# Altium PCB PCB2.PcbDoc
Units mm, origin at the board's own origin, x right, y up, seen from the top; angles counter-clockwise.
Board outline 80.26 x 48.27 mm, 2 copper layers (Top Layer, Bottom Layer); 29 components, 26 nets, 146 pads, 15 vias.
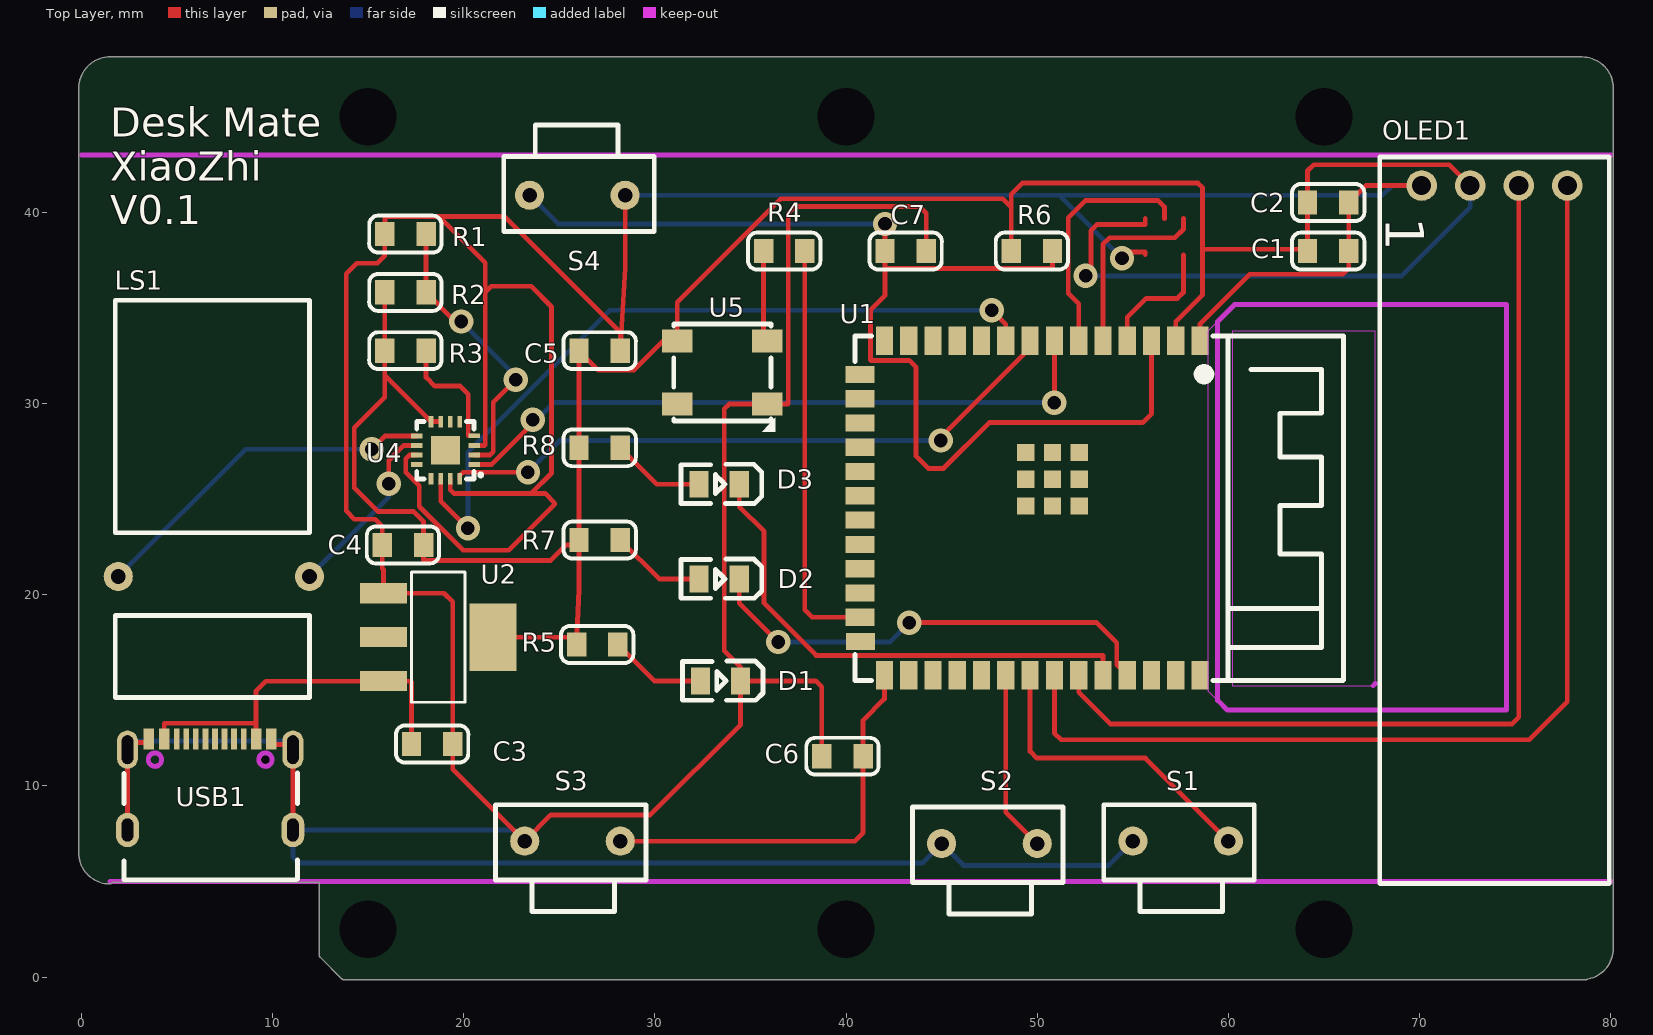
[diagram p0: Top Layer view]
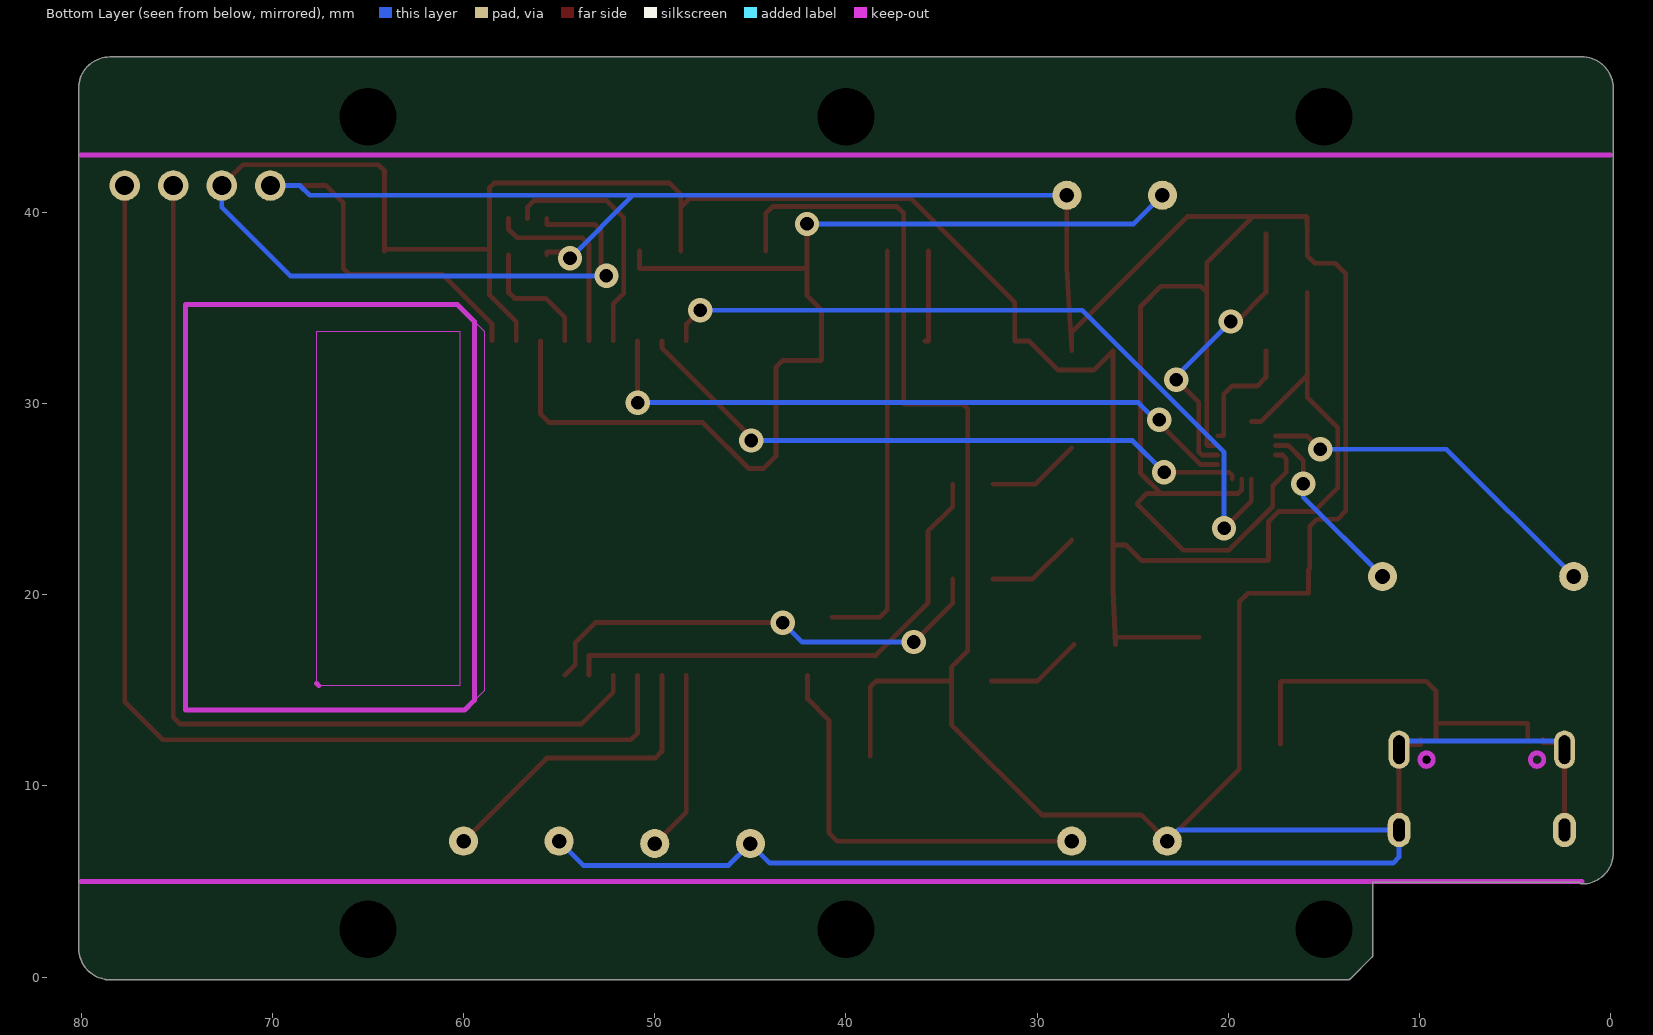
[diagram p1: Bottom Layer view, seen from below]
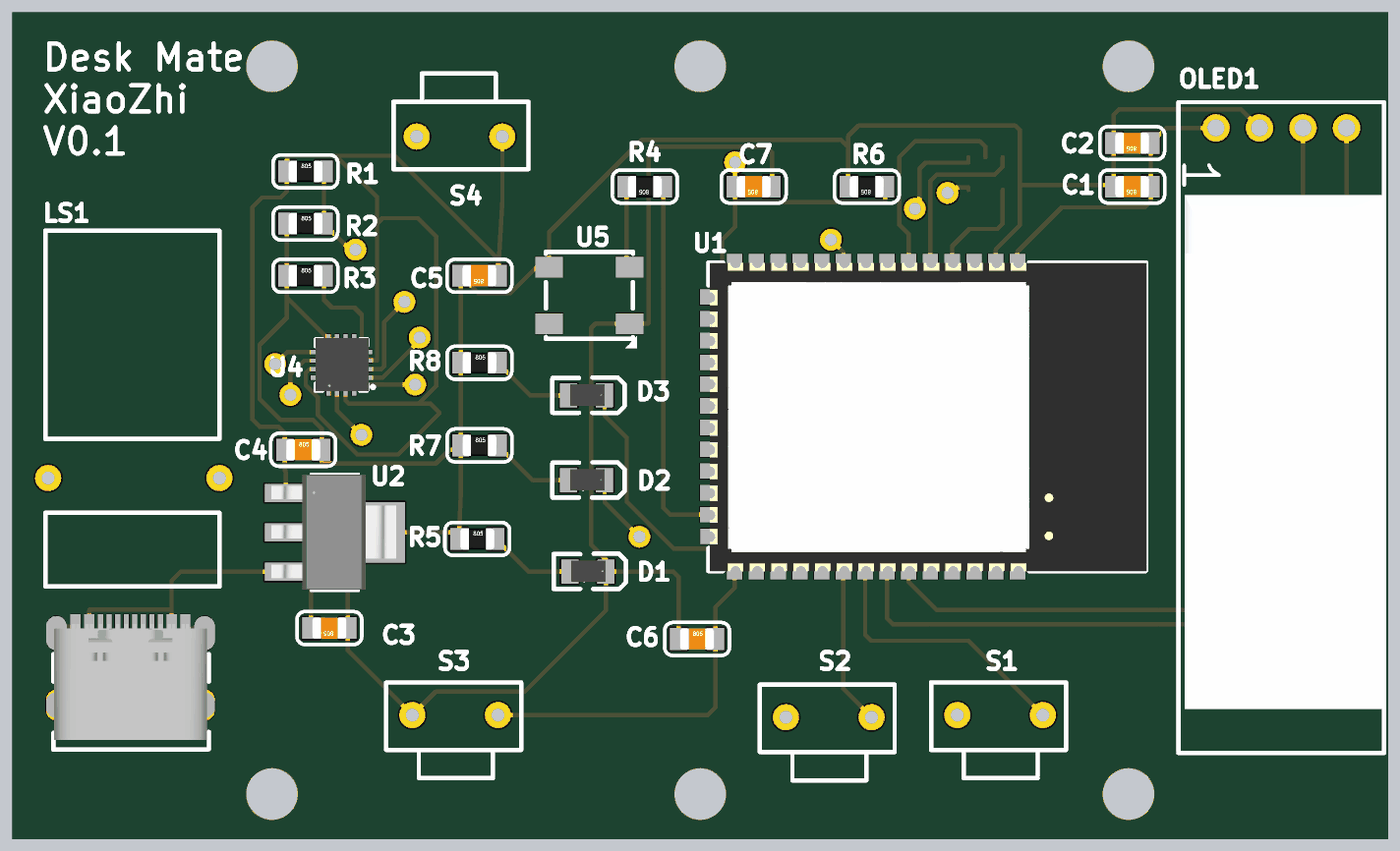
[diagram p2: 3D render of the assembled board from above, using the file's embedded part models]

## Layer stack, top to bottom
Top Solder: solder mask 0.0102, Solder Resist, Dk 3.5
Top Layer: signal copper 0.0356
Dielectric 1: dielectric 0.32, FR-4, Dk 4.8
Bottom Layer: signal copper 0.0356
Bottom Solder: solder mask 0.0102, Solder Resist, Dk 3.5

## Board outline
1.5,4.873 ccw(c1.5,5) 1.618,4.953 12.446,4.953 12.446,1.143 ccw(c12.573,1.143) 12.483,1.052 12.483,1.053 13.626,-0.09 13.625,-0.09 ccw(c13.716,0) 13.716,-0.127 78.716,-0.127 ccw(c78.716,0) 78.794,-0.101 ccw(c78.5,1.5) 80.127,1.5 80.127,46.5 ccw(c78.5,46.5) 78.5,48.127 1.576,48.127 ccw(c1.524,48.011) 1.524,48.139 ccw(c1.524,46.482) -0.127,46.35 -0.127,6.5 ccw(c1.5,6.5)

## Design rules (kind name [scope] priority, off if disabled: settings)
Clearance [All] p1: gap=0.15 ignorepadtopadclearanceinfootprint=TRUE
MinimumSolderMaskSliver [All] p1: minsoldermaskwidth=0.051
PolygonConnect [All] p1: connectstyle=Relief reliefconductorwidth=0.254 reliefentries=4 polygonreliefangle="90 Angle" airgapwidth=0.254
RoutingVias [All] p1: holewidth=0.711 width=1.27 viastyle="Through Hole" minholewidth=0.305 minwidth=0.61 maxholewidth=0.711 maxwidth=1.27
SilkToSilkClearance [All] p1: silktosilkclearance=0.051
SilkToSolderMaskClearance [IsPad] p1: minsilkscreentomaskgap=0.051 clearancetoexposedcopper=TRUE
SolderMaskExpansion [All] p1: expansion=0.102 istentingtop=FALSE
Width [All] p1: maxlimit=2 minlimit=0.14 preferedwidth=0.25
27 further rules are at their usual default settings.

## Components (designator, comment, footprint, x,y, rotation, side; value= is the part's Value field where it differs from the comment)
C1 "Cap" 0805C 66.294,37.973 r180 top value=0.1u
C2 "Cap" 0805C 66.294,40.513 r180 top value=10u
C3 "Cap" 0805C 19.431,12.192 r180 top value=10u
C4 "Cap" 0805C 15.748,22.606 r0 top value=10u
C5 "Cap" 0805C 28.191,32.766 r180 top value=10u
C6 "Cap Semi" 0805C 38.735,11.557 r0 top value=0.1u
C7 "Cap Semi" 0805C 44.196,37.973 r180 top value=0.1u
D1 "LED_R" LED0805-R-RD 33.435,15.494 r180 top locked
D2 "LED_G" LED0805-R-RD 33.367,20.828 r180 top locked
D3 "LED_Y" LED0805-R-RD 33.367,25.781 r180 top locked
LS1 "Speaker" SPK_11X15 11.938,20.955 r90 top locked
OLED1 "HS91L02W2C01" OLED-TH_L38.0-W12.0_HS91L02W2C01 73.914,41.402 r270 top
R1 "Res1" 0805R 15.875,38.862 r0 top value=0
R2 "Res1" 0805R 15.875,35.814 r0 top value=0
R3 "Res1" 0805R 15.875,32.766 r0 top value=300K
R4 "Res1" 0805R 37.846,37.973 r180 top value=0
R5 "Res1" 0805R 25.908,17.399 r0 top value=5k
R6 "Res1" 0805R 50.8,37.973 r180 top value=10k
R7 "Res1" 0805R 26.035,22.86 r0 top value=5k
R8 "Res1" 0805R 26.035,27.686 r0 top value=5k
S1 "SW-PB V+" SW_SIDE_CLICK_6X3X3 55,7.112 r270 top
S2 "SW-PB V-" SW_SIDE_CLICK_6X3X3 45,6.985 r270 top
S3 "SW-PB BOOT" SW_SIDE_CLICK_6X3X3 23.194,7.112 r270 top
S4 "SW-PB" SW_SIDE_CLICK_6X3X3 28.448,40.894 r90 top
U1 "ESP32-S3-WROOM-1-N16R2" WIRELM-SMD_ESP32-S3-WROOM-1 49.622,24.538 r270 top locked
U2 "LM1117IMPX-3.3/NOPB" SOT-223_L6.5-W3.5-P2.30-LS7.0-BR 18.669,17.78 r180 top
U4 "MAX98357AETE+T" TQFN-16_L3.0-W3.0-P0.50-BL-EP1.5 19.05,27.559 r90 top
U5 "SK6812" LED-SMD_4P-L5.0-W5.0-LS5.4-TL-1 33.528,31.623 r0 top locked
USB1 "TYPE-C 16PIN 2MD(073)" USB-C-SMD_TYPE-C-6PIN-2MD-073 6.744,10.071 r0 top locked

## Footprints (in the part's own frame and the unit in brackets; to place one, negate y for a bottom-side part, rotate by r counter-clockwise, add the part's x,y. Pads: shape width x height; smd on the part's side, far side on the other; paste and mask are expansions set on the pad)
0805C [mil]
  rect 40x50 smd: 1(0,0) 2(85,0)
  silkscreen extent -32,-38 117,38, body extent 3,-25 82,25, height 30
0805R [mil]
  rect 40x50 smd: 1(0,0) 2(85,0)
  silkscreen extent -32,-38 117,38, body extent 3,-25 82,25, height 30
LED0805-R-RD [mm]
  rect 1x1.4 smd: 1(1.05,0) 2(-1.05,0)
  silkscreen extent -2.22,-1.04 1.99,1.01, body extent -1.05,-0.65 0.95,0.6, height 0.71
LED-SMD_4P-L5.0-W5.0-LS5.4-TL-1 [mm]
  rect 1.6x1.2 smd paste+0 mask+0.05: 1(-2.35,1.65) 2(-2.35,-1.65) 3(2.35,-1.65) 4(2.35,1.65)
  silkscreen extent -2.54,-3.09 2.77,2.54
OLED-TH_L38.0-W12.0_HS91L02W2C01 [mm]
  round 1.6 hole 1: 1(0,-3.81) 2(0,-1.27) 3(0,1.27) 4(0,3.81)
  silkscreen extent -1.5,-6 36.5,6, body extent 3.93,-5.62 33.93,5.87, height 1.93
SOT-223_L6.5-W3.5-P2.30-LS7.0-BR [mm]
  rect 2.465x1.05 smd: 1(2.858,-2.3) 2(2.857,0) 3(2.857,2.3)
  rect 2.465x3.54 smd: 4(-2.857,0)
  silkscreen extent -1.4,-3.4 1.4,3.4, body extent -3.6,-3.38 3.69,3.33, height 1.81
SPK_11X15 [mil]
  round 60 hole 30: 1(0,0) 2(0,393.7)
  silkscreen extent -249,0 569,400
SW_SIDE_CLICK_6X3X3 [mil]
  round 60 hole 30: 1(0,0) 2(0,196.85)
  silkscreen extent -75,-60 145,250
TQFN-16_L3.0-W3.0-P0.50-BL-EP1.5 [mm]
  rect 0.25x0.6 smd paste-100 mask+0.051: 1(-0.748,-1.5) 2(-0.249,-1.5) 3(0.252,-1.5) 4(0.751,-1.5) 9(0.75,1.5) 10(0.25,1.5) 11(-0.25,1.5) 12(-0.748,1.5)
  rect 0.6x0.25 smd paste-100 mask+0.051: 5(1.5,-0.748) 6(1.5,-0.248) 7(1.5,0.252) 8(1.5,0.752) 13(-1.5,0.752) 14(-1.5,0.252) 15(-1.5,-0.248) 16(-1.5,-0.748)
  rect 1.5x1.5 smd paste-100 mask+0.051: 17(0,0)
  silkscreen extent -1.5,-1.9 1.5,1.5, body extent -1.52,-1.6 1.58,1.5, height 0.81
USB-C-SMD_TYPE-C-6PIN-2MD-073 [mm]
  rect 0.55x1.1 smd paste-100 mask+0.05: 1(-3.2,2.375) 2(-2.4,2.375) 11(2.4,2.375) 12(3.2,2.375)
  rect 0.3x1.1 smd paste-100 mask+0.05: 3(-1.75,2.375) 4(-1.25,2.375) 5(-0.75,2.375) 6(-0.25,2.375) 7(0.25,2.375) 8(0.75,2.375) 9(1.25,2.375) 10(1.75,2.375)
  oval 1.2x1.8 hole 0.6 slot 1.2 at 90 deg paste+0 mask+0.05: 13(-4.325,-2.375) 14(4.325,-2.375)
  oval 1.1x2 hole 0.6 slot 1.5 at 90 deg paste+0 mask+0.05: 13(-4.325,1.825) 14(4.325,1.825)
  Keep-Out Layer board cut-out: 3.24,1.305 3.191,1.477 3.063,1.603 2.89,1.649 2.717,1.603 2.589,1.477 2.54,1.305 2.54,1.305 2.589,1.133 2.717,1.007 2.89,0.961 3.063,1.007 3.191,1.133 3.24,1.305
  Keep-Out Layer circle w0.254: c2.89,1.305 r0.35
  Keep-Out Layer circle w0.025: c2.89,1.305 r0.35
  Keep-Out Layer circle w0.254: c-2.89,1.305 r0.35
  Keep-Out Layer circle w0.025: c-2.89,1.305 r0.35
  silkscreen extent -4.5,-4.97 4.57,0.6, body extent -4.47,-4.4 4.47,2.35, height 3.17
WIRELM-SMD_ESP32-S3-WROOM-1 [mm]
  rect 1.5x0.9 smd paste+0 mask+0.05: 1(-8.75,8.895) 2(-8.75,7.625) 3(-8.75,6.355) 4(-8.75,5.085) 5(-8.75,3.815) 6(-8.75,2.545) 7(-8.75,1.275) 8(-8.75,0.005) 9(-8.75,-1.265) 10(-8.75,-2.535) 11(-8.75,-3.805) 12(-8.75,-5.075) 13(-8.75,-6.345) 14(-8.75,-7.615) 27(8.75,-7.615) 28(8.75,-6.345) 29(8.75,-5.075) 30(8.75,-3.805) 31(8.75,-2.535) 32(8.75,-1.265) 33(8.75,0.005) 34(8.75,1.275) 35(8.75,2.545) 36(8.75,3.815) 37(8.75,5.085) 38(8.75,6.355) 39(8.75,7.625) 40(8.75,8.895)
  rect 0.9x1.5 smd paste+0 mask+0.05: 15(-6.985,-8.895) 16(-5.715,-8.895) 17(-4.445,-8.895) 18(-3.175,-8.895) 19(-1.905,-8.895) 20(-0.635,-8.895) 21(0.635,-8.895) 22(1.905,-8.895) 23(3.175,-8.895) 24(4.445,-8.895) 25(5.715,-8.895) 26(6.985,-8.865)
  rect 0.9x0.9 smd: 41(-2.9,1.175) 41(-2.9,2.575) 41(-2.9,-0.225) 41(-1.5,2.575) 41(-1.5,1.175) 41(-1.5,-0.225) 41(-0.1,2.575) 41(-0.1,1.175) 41(-0.1,-0.225)
  silkscreen extent -9,-9.14 9.02,16.39, body extent -8.97,-9.05 9.03,16.45, height 3.1

## Part data
C1 C2 C3 C4 C5: "Capacitor", LatestRevisionDate=17-Jul-2002, LatestRevisionNote="Re-released for DXP Platform.", PackageDescription="Radial Cap, Thru-Hole; 2 Leads; 0.3 in Pin Spacing", PackageReference=RAD-0.3, Published=8-Jun-2000, Publisher="Altium Limited"
C6 C7: "Capacitor (Semiconductor SIM Model)", LatestRevisionDate=29-May-2009, LatestRevisionNote="IPC-7351 Footprint Added.", PackageDescription="Chip Capacitor", PackageReference=C1206, Published=8-Jun-2000, Publisher="Altium Limited"
D1 D2 D3: library part LED0, "Typical INFRARED GaAs LED", LatestRevisionDate=08-Jul-2005, LatestRevisionNote="Mech Layer 1 removed.", PackageDescription="LED; 2 Leads", PackageReference=LED-0, Published=8-Jun-2000, Publisher="Altium Limited"
LS1: "Loudspeaker", LatestRevisionDate=17-Jul-2002, LatestRevisionNote="Re-released for DXP Platform.", PackageReference=PIN2, Published=24-Mar-1999, Publisher="Altium Limited"
OLED1: JLCPCB Part Class="Extended Part", LCSC Part Name=0.91寸OLED显示屏白光IIC, Manufacturer=HS(汉昇), Operating Temperature=-40℃~+70℃, Add into BOM=yes, Convert to PCB=yes, Datasheet=https://atta.szlcsc.com/upload/public/pdf/source/20230727/C3E43C8E3DDA847F5681FEE7D95C153D.pdf, Device=HS91L02W2C01, Interface Type=I2C, Main Control Chip=SSD1306, Manufacturer Part=HS91L02W2C01, Pixel Resolution=128x32, Size=0.91, Supplier=LCSC, Supplier Footprint=-, Supplier Part=C5248081, Symbol=HS91L02W2C01
R1 R2 R3 R4 R5 R6 R7 R8: "Resistor", LatestRevisionDate=17-Jul-2002, LatestRevisionNote="Re-released for DXP Platform.", PackageDescription="Axial Device, Thru-Hole; 2 Leads; 0.3 in Pin Spacing", PackageReference=AXIAL-0.3, Published=8-Jun-2000, Publisher="Altium Limited"
S1 S2 S3: library part SW-PB, "Switch", LatestRevisionDate=17-Jul-2002, LatestRevisionNote="Re-released for DXP Platform.", PackageDescription="Switch; 2 Leads", PackageReference=SPST-2, Published=24-Mar-1999, Publisher="Altium Limited"
S4: "Switch", LatestRevisionDate=17-Jul-2002, LatestRevisionNote="Re-released for DXP Platform.", PackageDescription="Switch; 2 Leads", PackageReference=SPST-2, Published=24-Mar-1999, Publisher="Altium Limited"
U1: JLCPCB Part Class="Extended Part", LCSC Part Name=通用型Wi-Fi+低功耗蓝牙MCU模组, Manufacturer=ESPRESSIF(乐鑫), Add into BOM=yes, Convert to PCB=yes, Datasheet=https://atta.szlcsc.com/upload/public/pdf/source/20220628/A2AC12B3C87735CAEB7EBE2DBE80936C.pdf, Device=ESP32-S3-WROOM-1-N16R2, Manufacturer Part=ESP32-S3-WROOM-1-N16R2, Supplier=LCSC, Supplier Footprint=SMD,18x25.5mm, Supplier Part=C2913205, Symbol=ESP32-S3-WROOM-1(N16R2)
U2: Dropout Voltage=1.2V@(800mA), JLCPCB Part Class="Extended Part", LCSC Part Name="输入20V 输出3.3V 800mA", Manufacturer=TI(德州仪器), MAX Output Current=800mA, Maximum Input Voltage=15V, Operating Temperature=-40℃~+125℃, Output Voltage=3.3V, Power Supply Rejection Ratio (PSRR)=75dB@(120Hz), standby current=5mA, Add into BOM=yes, Convert to PCB=yes, Datasheet=http://www.ti.com/cn/lit/gpn/lm1117, Device=LM1117IMPX-3.3/NOPB, Manufacturer Part=LM1117IMPX-3.3/NOPB, Number of Outputs=1, Output Polarity=正极, Output Type=固定, Supplier=LCSC, Supplier Footprint=SOT-223, Supplier Part=C23984, Symbol=LM1117IMPX-3.3/NOPB
U4: JLCPCB Part Class="Extended Part", LCSC Part Name="微型、低成本、PCM 类 D 级放大器具有 AB 级性能", Manufacturer=ADI(亚德诺)/MAXIM(美信), Operating Temperature=-40℃~+85℃, Output Power=3.2Wx2@4Ω, Supply Voltage=2.5V~5.5V, Type of Power Amplifier=-, Add into BOM=yes, Convert to PCB=yes, Datasheet=https://atta.szlcsc.com/upload/public/pdf/source/20210106/C910544_CB6DE4B2CEE254A72E6BDB40E718D281.pdf, Device=MAX98357AETE+T, Manufacturer Part=MAX98357AETE+T, Speaker Channels=单声道, Supplier=LCSC, Supplier Footprint=TQFN-16-EP(3x3), Supplier Part=C910544, Symbol=MAX98357AETE+T
U5: library part SK6812_C5378720, JLCPCB Part Class="Extended Part", Manufacturer=欧思科光电, Add into BOM=yes, Convert to PCB=yes, Datasheet=https://atta.szlcsc.com/upload/public/pdf/source/20230330/4C8DEAC234E2ECEEE596F166E9B92CF0.pdf, Device=SK6812_C5378720, LCSC Part Name=SK6812, Manufacturer Part=SK6812, Supplier=LCSC, Supplier Footprint=SMD-4P,5.4x5mm, Supplier Part=C5378720, Symbol=SK6812_C5378720
USB1: Core Colour=黑色, Current Rating - Power (Max)=5A, JLCPCB Part Class="Extended Part", LCSC Part Name="Type-C 母 卧贴", Manufacturer="SHOU HAN(首韩)", Operating Temperature Range=-25℃~+85℃, Rated Voltage (Max)=5V, Add into BOM=yes, Connect-Disconnect Life=5千次, Connector Type=Type-C, Convert to PCB=yes, Datasheet=https://atta.szlcsc.com/upload/public/pdf/source/20211123/39B17C16241EAC15C5E277BDA434118E.pdf, Device="TYPE-C 16PIN 2MD(073)", Gender=母, Manufacturer Part="TYPE-C 16PIN 2MD(073)", Mounting Style=卧贴, Number of Contacts=16P, Number of Ports=1, Standard="USB 3.1", Supplier=LCSC, Supplier Footprint=SMD, Supplier Part=C2765186, Symbol="TYPE-C 16PIN 2MD(073)"

## Free pads (board coordinates)
  round 1.524 hole 3: A(15,2.5) A(15,45) G(40,2.5) G(40,45) G(65,2.5) G(65,45)

## Via types
v1: diameter 1.27, hole 0.711, Top Layer to Bottom Layer, 15 vias

## Nets (pads, with @x,y where several pads share a name; then routed paths per layer and width w, separated by ;. In a path a pad name is that pad's centre, name@x,y a point inside that pad or via, vN(x,y) a via of type N, cw(c..) or ccw(c..) an arc to the next point about the centre after c; other vN are vias at no path point)
3V3: C1.2 C2.2 C4.2 C5.2 OLED1.2 R2.1 R3.1 R5.1 R6.2 R7.1 R8.1 U1.2 U2.4 U4.7 U4.8 U5.1 | length 147.1
  Top Layer w0.25: R2.1 R3.1 15.875,31.482 ; U4.7 U4.8 15.875,31.482 ; U2.4 25.908,17.78 R5.1 26.035,20.269 R7.1@26.035,22.606 ; R6.2 48.641,40.259 ; v1(52.527,36.678) 52.807,36.957 52.807,39.027 53.149,39.37 55.65,39.37 55.65,39.685 ; U1.2 57.247,34.29 58.65,35.693 58.65,37.785 58.65,38.073 ; C1.2 C1.2@64.135,38.073 ; OLED1.2 71.552,42.494 64.465,42.494 64.135,42.164 C2.2 C1.2@64.135,38.073 ; 15.875,31.482 15.875,30.323 14.279,28.727 14.279,25.586 15.507,24.359 17.374,24.359 17.907,23.825 C4.2 17.907,21.822 17.932,21.797 24.558,21.797 25.367,22.606 R7.1@26.035,22.606 ; R7.1@26.035,22.606 R7.1 R8.1 26.032,30.229 C5.2 27.048,31.75 28.905,31.75 30.428,33.273 U5.1 31.178,35.301 36.582,40.705 48.195,40.705 48.641,40.259 ; 48.641,40.259 48.641,40.945 49.227,41.53 58.406,41.53 58.65,41.286 58.65,39.685 58.65,38.073 ; 58.65,38.073 C1.2@64.135,38.073
  Bottom Layer w0.25: v1(52.527,36.678) 69.063,36.678 72.644,40.259 OLED1.2
5V: C3.2 U2.3 USB1.2 USB1.11 | length 19.8
  Top Layer w0.25: USB1.2 4.344,13.259 4.369,13.284 9.119,13.284 9.144,13.259 ; USB1.11 9.144,13.259 ; C3.2 17.272,15.455 17.247,15.48 U2.3 9.652,15.48 9.144,14.972 9.144,13.259
BCLK_GPIO15: U1.8 U4.16 | length 33.3
  Top Layer w0.25: U4.16 19.798,26.238 19.97,26.411 v1(23.363,26.411) ; v1(44.958,28.067) 44.958,28.245 49.627,32.914 U1.8
  Bottom Layer w0.25: v1(23.363,26.411) 25.019,28.067 v1(44.958,28.067)
DIN_GPIO7: U1.7 U4.1 | length 35
  Top Layer w0.25: U4.1 21.453,26.811 23.622,28.98 v1(23.622,29.159) ; v1(50.897,30.048) U1.7
  Bottom Layer w0.25: v1(23.622,29.159) 23.813,29.159 24.703,30.048 v1(50.897,30.048)
EN: C7.2 R6.1 S4.2 U1.3 | length 61.1
  Top Layer w0.25: v1(42.037,39.395) C7.2 42.037,37.084 ; R6.1 50.8,37.084 50.775,37.059 42.062,37.059 42.037,37.084 ; U1.3 55.977,29.464 55.52,29.007 47.498,29.007 45.098,26.607 44.31,26.607 43.663,27.254 43.663,31.902 43.307,32.258 41.3,32.258 41.275,32.283 41.275,34.874 42.037,35.636 42.037,37.084
  Bottom Layer w0.25: S4.2 24.947,39.395 v1(42.037,39.395)
GND: C1.1 C2.1 C3.1 C4.1 C5.1 C6.1 C7.1 D1.2 OLED1.1 R1.1 S1.1 S2.1 S3.1 S4.1 U1.1 U2.1 U4.3 U4.11 U4.15 U5.3 USB1.1 USB1.12 USB1.13 USB1.14 | length 320.2
  Top Layer w0.25: USB1.13@2.419,7.696 2.419,9.779 2.419,11.896 2.419,12.268 3.544,12.268 USB1.1 ; USB1.12 9.944,12.167 11.069,12.167 11.069,11.896 11.069,9.779 USB1.14@11.069,7.696 ; U4.11 17.17,27.309 16.975,27.114 16.975,26.397 17.684,25.688 17.684,24.615 19.972,22.327 22.352,22.327 24.765,24.74 24.765,24.79 24.257,25.298 23.47,25.298 ; U4.15 19.298,25.482 19.482,25.298 23.47,25.298 ; S4.1 28.448,37.087 C5.1 28.191,33.731 22.146,39.776 18.72,39.776 ; C6.1 38.735,15.176 38.417,15.494 D1.2 ; C7.1 44.196,39.941 43.832,40.305 37.346,40.305 36.982,39.941 36.982,29.998 36.957,29.973 U5.3 33.884,29.973 33.63,29.719 33.63,17.061 34.486,16.205 D1.2 ; v1(54.432,37.605) 54.75,37.922 55.65,37.922 55.65,37.785 ; U1.1 58.517,34.177 61.107,36.767 65.977,36.767 66.294,37.084 C1.1 C2.1 67.183,41.402 OLED1.1 ; R1.1 15.9,39.776 ; R1.1 15.875,39.751 15.9,39.776 ; R1.1 15.875,37.719 15.494,37.338 14.414,37.338 13.858,36.782 13.858,24.384 14.29,23.952 15.367,23.952 15.748,23.571 C4.1 15.748,21.374 15.811,21.311 U2.1 18.973,20.08 19.431,19.621 C3.1 19.431,10.875 S3.1 24.566,8.484 29.761,8.484 34.486,13.208 D1.2 ; 15.9,39.776 18.72,39.776 ; 18.72,39.776 21.133,37.363 21.133,35.814 ; 21.133,27.836 21.133,35.814 ; 21.133,27.836 U4.3 21.107,27.811 21.133,27.836 ; 21.133,35.814 21.45,36.131 23.524,36.131 24.596,35.06 24.596,26.357 23.537,25.298 23.47,25.298
  Bottom Layer w0.25: USB1.13@2.419,11.896 2.419,12.344 11.069,12.344 USB1.14@11.069,11.896 ; S3.1 22.61,7.696 11.069,7.696 11.069,6.286 11.386,5.969 43.984,5.969 S2.1 46.143,5.842 53.73,5.842 S1.1 ; S4.1 51.143,40.894 ; v1(54.432,37.605) 51.143,40.894 ; OLED1.1 68.555,41.402 68.047,40.894 51.143,40.894
GPIO0: C6.2 S3.2 U1.27 | length 21.6
  Top Layer w0.25: S3.2 40.45,7.112 40.894,7.556 C6.2 40.894,13.441 42.007,14.554 U1.27
GPIO39: S2.2 U1.32 | length 9.5
  Top Layer w0.25: U1.32 48.357,8.628 S2.2
GPIO40: S1.2 U1.33 | length 16.3
  Top Layer w0.25: U1.33 49.627,11.803 49.974,11.455 55.657,11.455 S1.2
GPIO48: R4.1 U1.25 | length 21.8
  Top Layer w0.25: R4.1 37.846,19.204 38.227,18.823 U1.25
LRC_GPIO16: U1.9 U4.14 | length 39.5
  Top Layer w0.25: U4.14 18.798,24.9 v1(20.223,23.474) ; v1(47.625,34.874) 48.357,34.142 U1.9
  Bottom Layer w0.25: v1(20.223,23.474) 20.223,27.445 27.652,34.874 v1(47.625,34.874)
NetD1_1: D1.1 R5.2 | length 5.1
  Top Layer w0.25: R5.2 29.972,15.494 D1.1
NetD2_1: D2.1 R7.2 | length 5
  Top Layer w0.25: R7.2 30.226,20.828 D2.1
NetD3_1: D3.1 R8.2 | length 4.9
  Top Layer w0.25: R8.2 30.099,25.781 D3.1
NetLS1_1: LS1.1 U4.10 | length 9.6
  Top Layer w0.25: v1(16.078,25.806) 16.078,27.022 16.866,27.809 U4.10
  Bottom Layer w0.25: LS1.1 16.078,25.095 v1(16.078,25.806)
NetLS1_2: LS1.2 U4.9 | length 18.7
  Top Layer w0.25: v1(15.189,27.61) 15.888,28.309 U4.9
  Bottom Layer w0.25: LS1.2 8.593,27.61 v1(15.189,27.61)
NetR1_2: R1.2 R2.2 U4.2 | length 15.1
  Top Layer w0.25: R1.2 R2.2 19.558,34.29 v1(19.875,34.29) ; U4.2 21.387,27.31 21.55,27.474 21.55,30.059 v1(22.733,31.242)
  Bottom Layer w0.25: v1(19.875,34.29) 22.733,31.432 v1(22.733,31.242)
NetR3_2: R3.2 U4.4 | length 6.5
  Top Layer w0.25: R3.2 18.034,31.369 18.491,30.912 19.812,30.912 20.244,30.48 20.244,28.31 U4.4
NetR4_2: R4.2 U5.4 | length 4.9
  Top Layer w0.25: R4.2 35.687,33.273 U5.4
RXD0: D3.2 U1.36 | length 26.7
  Top Layer w0.25: D3.2 34.417,24.613 35.712,23.317 35.712,19.55 38.434,16.828 53.437,16.828 U1.36
SCK_GPIO5: U1.5 | length 10.1
  Top Layer w0.25: U1.5 53.437,35.767 ; 53.437,35.768 53.437,38.319 53.785,38.666 57.2,38.666 57.65,39.116 57.65,39.685
SCL: OLED1.3 U1.35 | length 52.5
  Top Layer w0.25: U1.35 52.167,14.902 53.823,13.246 74.841,13.246 75.184,13.589 OLED1.3
SD_GPIO6: U1.6 | length 12.8
  Top Layer w0.25: U1.6 52.167,35.208 51.617,35.758 51.617,39.717 52.514,40.615 56.325,40.615 56.65,40.289 56.65,39.685
SDA: OLED1.4 U1.34 | length 57.8
  Top Layer w0.25: U1.34 50.897,12.768 51.244,12.421 75.743,12.421 77.724,14.402 OLED1.4
TXD0: D2.2 U1.37 | length 24.6
  Top Layer w0.25: D2.2 34.417,19.558 v1(36.449,17.526) ; v1(43.307,18.542) 53.114,18.542 54.162,17.494 54.162,16.333 U1.37
  Bottom Layer w0.25: v1(36.449,17.526) 42.291,17.526 v1(43.307,18.542)
WS_GPIO4: U1.4 | length 6.7
  Top Layer w0.25: U1.4 54.707,34.501 55.702,35.496 57.333,35.496 57.65,35.814 57.65,37.785
pads on no net: U1.10 U1.11 U1.12 U1.13 U1.14 U1.15 U1.16 U1.17 U1.18 U1.19 U1.20 U1.21 U1.22 U1.23 U1.24 U1.26 U1.28 U1.29 U1.30 U1.31 U1.38 U1.39 U1.40 U1.41 U2.2 U4.5 U4.6 U4.12 U4.13 U4.17 U5.2 USB1.3 USB1.4 USB1.5 USB1.6 USB1.7 USB1.8 USB1.9 USB1.10

## Keep-outs
Keep-Out Layer:
  pour cut-out: 58.928,14.986 59.944,13.97 74.549,13.97 74.549,35.179 60.325,35.179 58.928,33.782
  pour cut-out: 60.198,15.24 67.564,15.24 67.691,15.367 67.691,33.782 60.198,33.782
  lines w0.254: 0,43 80,43 ; 1.5,5 80,5 ; 67.564,15.24 67.691,15.367 ; 59.436,14.478 59.436,34.29 60.325,35.179 74.549,35.179 74.549,13.97 59.944,13.97 59.436,14.478

## Silkscreen, mask and mechanical layers (free items; w line width, h text height)
Top Overlay:
  text "Desk Mate / XiaoZhi / V0.1" at 1.524,39.37 h1.52
Mechanical 1:
  lines w0.254: 0,46.355 cw(c1.524,46.482) 1.524,48.011 ; 0,46.5 0,6.5 ccw(c1.5,6.5) 1.5,5 ; 1.5,5.08 12.573,5.08 12.573,1.143 13.716,0 78.716,0 ; 1.5,48 78.5,48 cw(c78.5,46.5) 80,46.5 80,1.5 cw(c78.5,1.5) 78.5,0

## Text inside footprints (layer, text, board x,y; h text height)
OLED1: Top Overlay "1" at 68.237,39.743 h2.03 r270